# Allegro board TESTBED_IN4007.brd
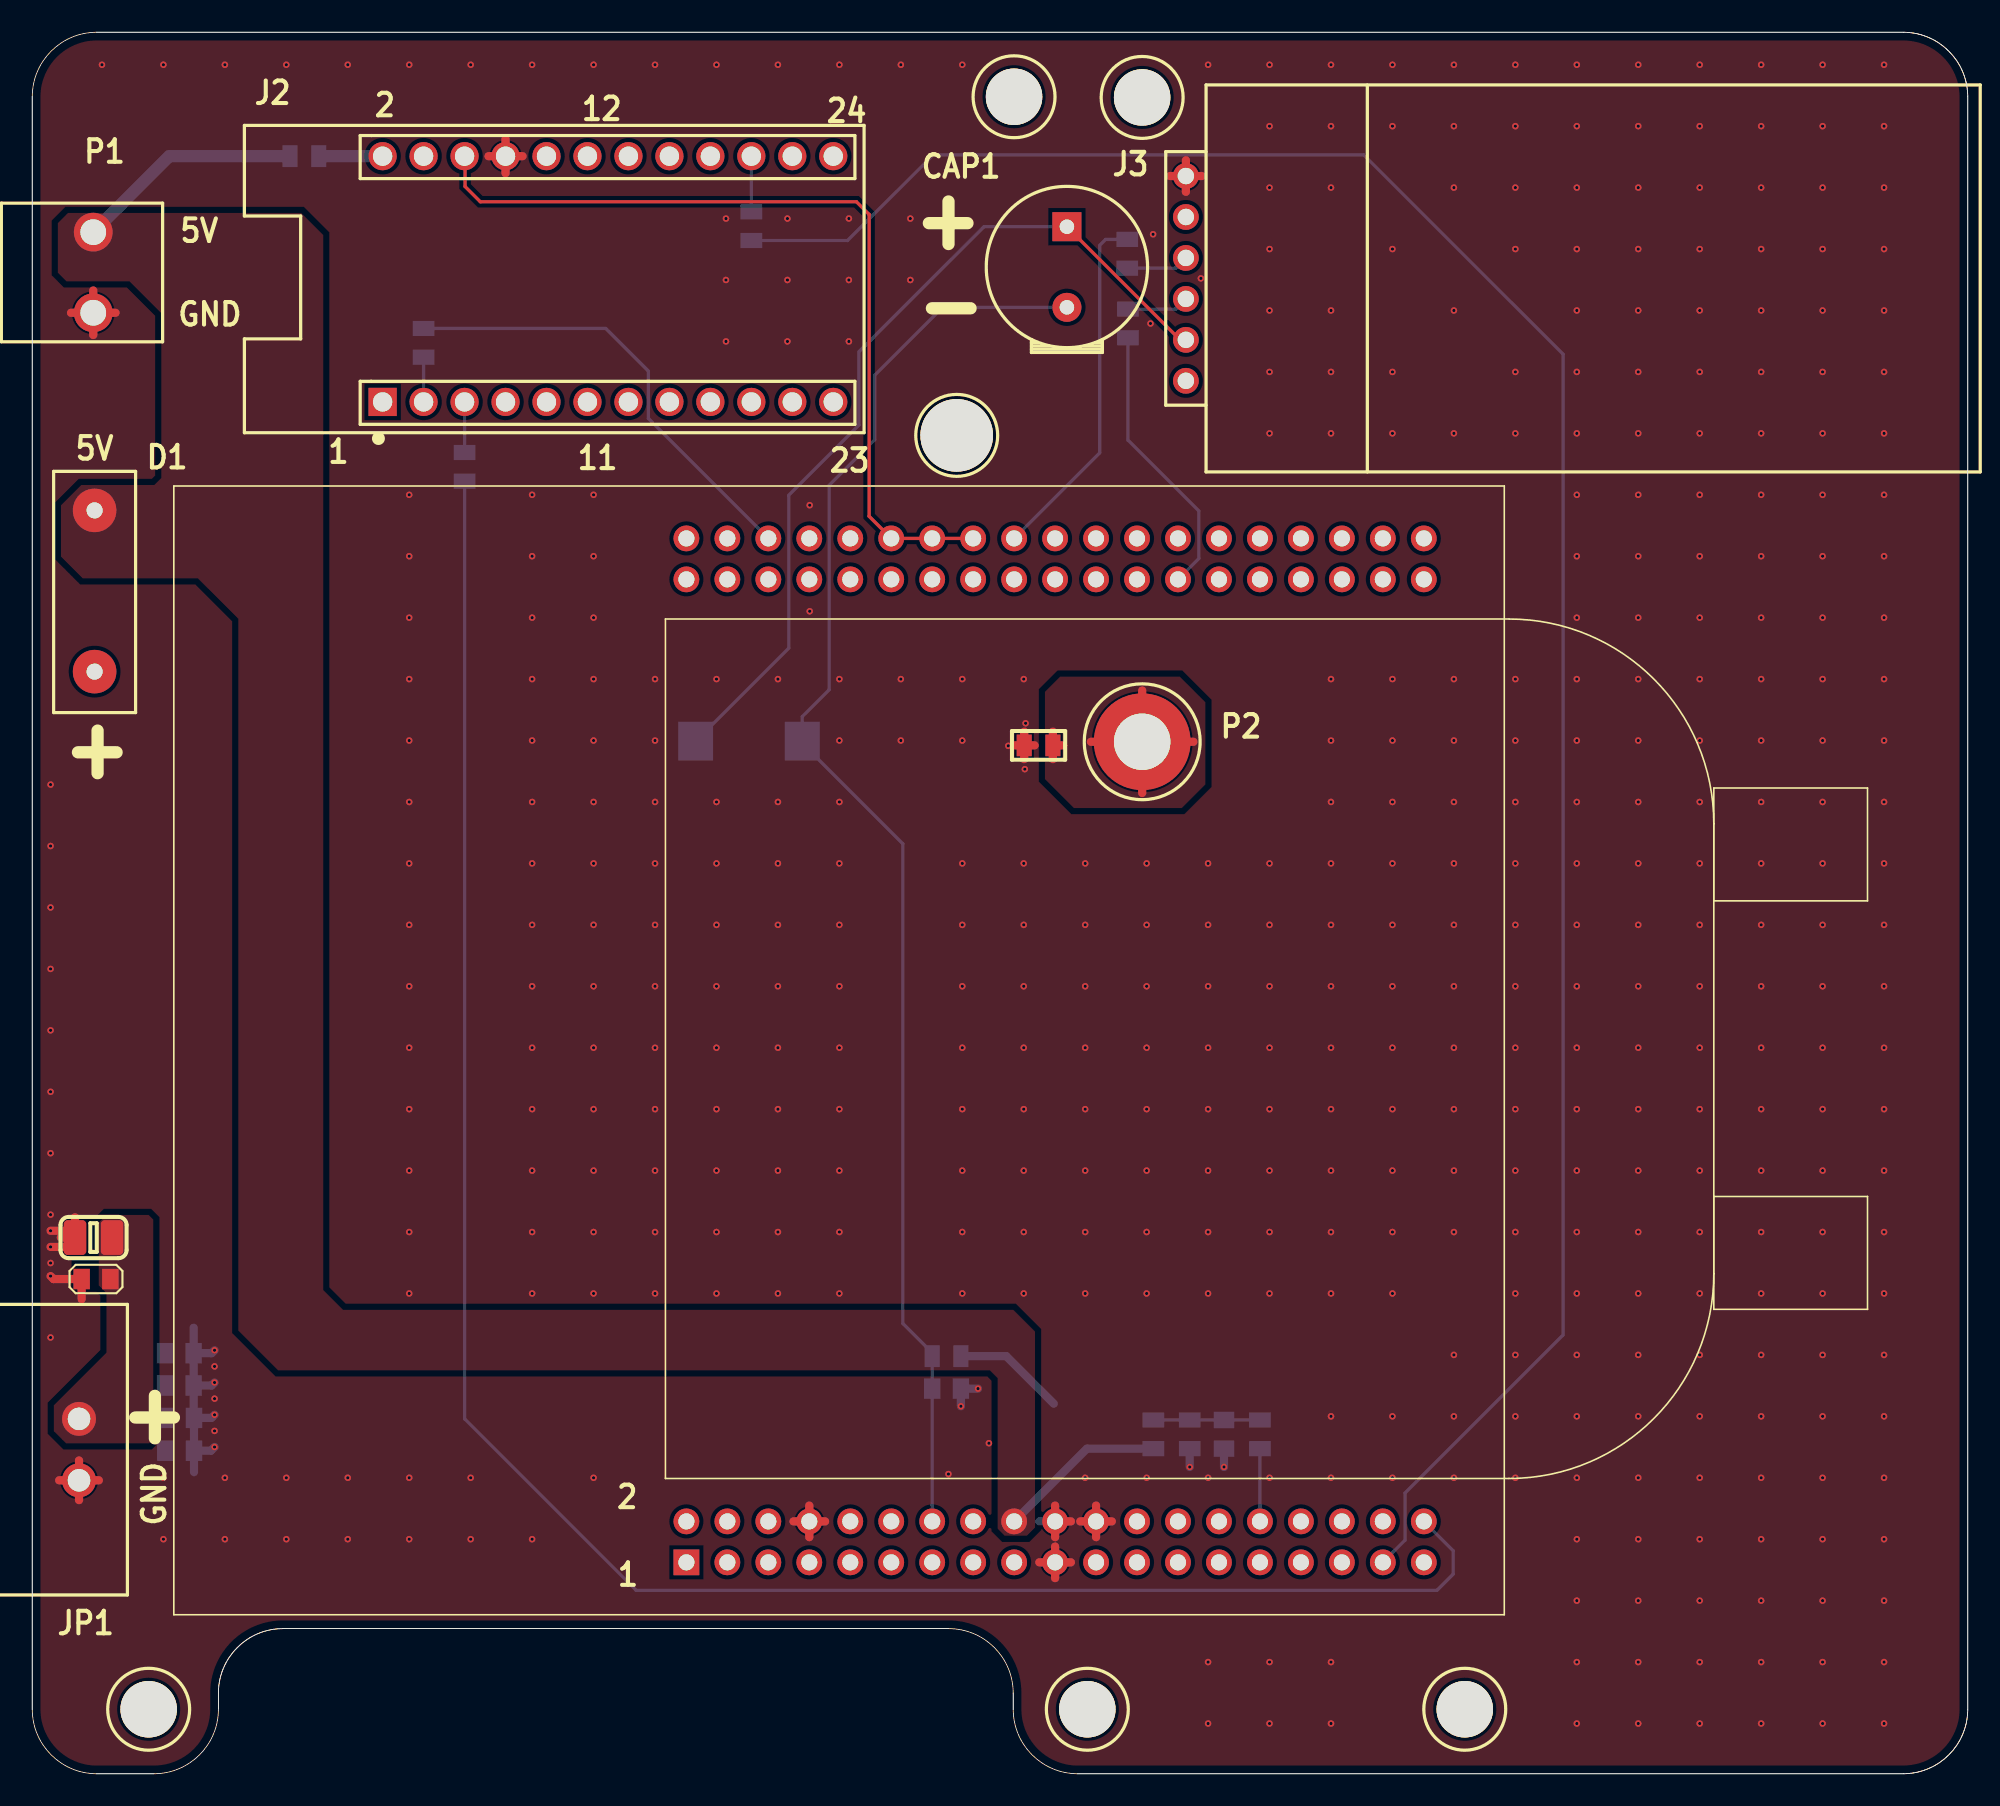
[diagram p0: board, top side]
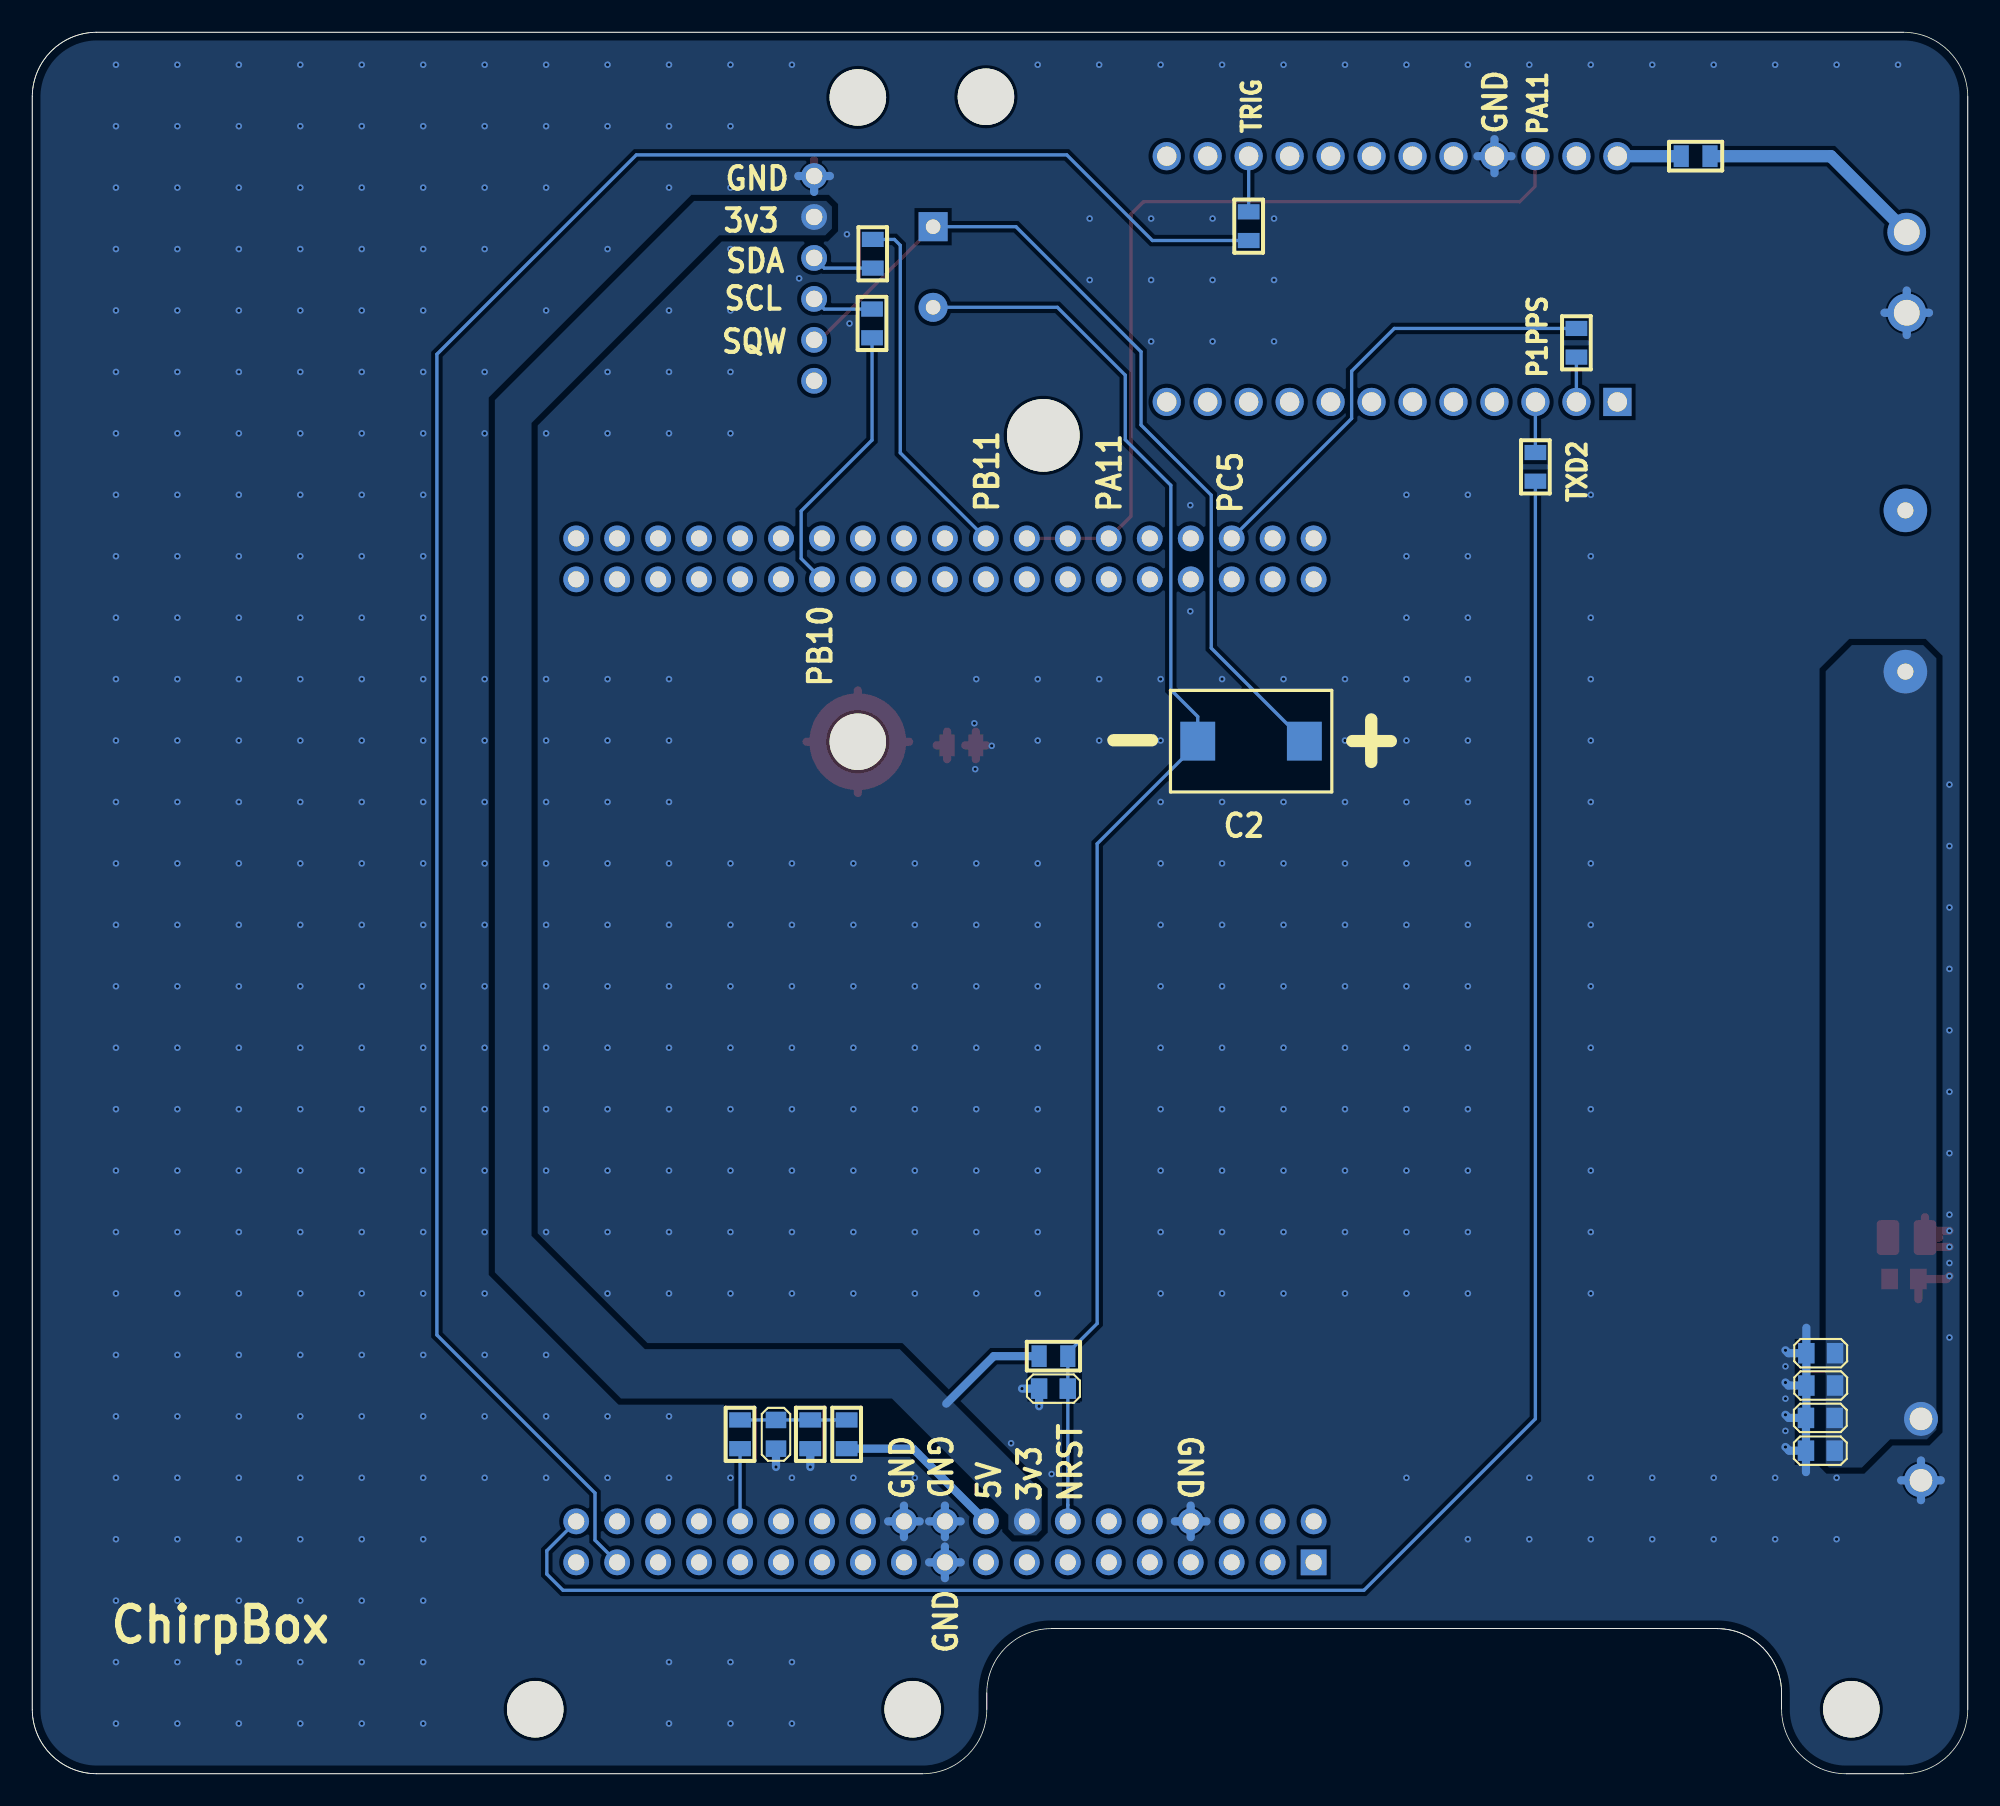
[diagram p1: board, bottom side, seen from below]

Outline 120 x 108 mm; copper layers: TOP, BOTTOM. Coordinates in mm from the lower left corner of the outline.
Outline path: 0,104 0,4 ; 0,104 arc(1.17,106.83) 4,108 ; 0,104 0,4 ; 0,4 arc(1.17,1.17) 4,0 ; 4,108 115.99,108 ; 4,108 115.99,108 ; 115.99,108 arc(118.82,106.83) 120,104 ; 115.99,108 arc(118.82,106.83) 120,104 ; 4,0 7.54,0 ; 4,0 7.54,0 ; 7.54,0 arc(10.37,1.17) 11.54,4 ; 11.54,5 11.54,4 ; 11.54,5 arc(12.71,7.83) 15.54,9 ; 11.54,5 arc(12.71,7.83) 15.54,9 ; 11.54,5 11.54,4 ; 15.54,9 56.82,9 ; 15.54,9 56.82,9 ; 56.82,9 arc(59.65,7.83) 60.82,5 ; 60.82,5 60.82,4 ; 60.82,5 60.82,4 ; 60.82,4 arc(61.99,1.17) 64.82,0 ; 64.82,0 116,0 ; 64.82,0 116,0 ; 116,0 arc(118.83,1.17) 120,4 ; 116,0 arc(118.83,1.17) 120,4 ; 120,104 120,4 ; 120,104 120,4

## Placement (name value [footprint] x y rotation side)
C1  DNP  [C0805]  56.69 23.88 0 bottom
C2  100u 25V X7R  [C7374]  44.43 64.04 0 bottom
C3  0.1u  [C0805]  73.89 21.05 270 bottom
C4  0.1u  [C0805]  9.14 20.04 0 bottom
C5  0.1u  [C0805]  9.14 22.07 0 bottom
C6  0.1u  [C0805]  9.12 24.08 0 bottom
C7  0.1u  [C0805]  9.12 26.08 0 bottom
C8  1u  [C0805]  3.95 30.68 180 top
C9  10u  [C1206]  3.8 33.25 180 top
CAP1  DNP  [CP2V_D10R0_5R0]  64.15 93.44 270 top
D1  1N4007  [2D7X2]  3.87 68.35 90 top
J1  NUCLEO_PLUG  [38PX2]  -13.72 -17.71 0 top
J2  Navspark  [12PX2_2D54_15D24]  35.69 92.69 0 top
J3  RTC_PLUG  [2D54_6P_FEMALE_SMT]  70.95 85.95 0 top
JP1  Holes  [3D81X2]  2.9 22.01 270 top
NOREF  -  [unnamed]  57.32 83 0 top
NOREF#2  -  [unnamed#2]  68.82 64 0 top
NOREF#3  -  [unnamed#2]  68.81 103.96 0 top
NOREF#4  -  [unnamed#2]  65.41 4 0 top
NOREF#5  -  [unnamed#2]  7.22 4 0 top
NOREF#6  -  [unnamed#2]  88.82 4 0 top
NOREF#7  -  [unnamed#2]  60.87 104 0 top
P1  Bat  [MY_2PIN]  3.78 95.6 270 top
P2  HOLE3d5  [I3D5_O6MM]  68.82 64 0 top
R1  100k  [R0805]  56.69 25.9 180 bottom
R2  DNP  [R0805]  16.87 100.31 0 bottom
R3  33  [R0805]  24.26 88.74 90 bottom
R4  33  [R0805]  26.81 81.05 270 bottom
R5  33  [R0805]  44.58 95.97 90 bottom
R6  100k  [R0805]  69.51 21.05 90 bottom
R7  33  [R0805]  67.89 94.26 90 bottom
R8  33  [R0805]  67.93 89.94 270 bottom
R9  33  [R0805]  76.12 21.05 90 bottom
R10  100k  [R0805]  71.76 21.05 90 bottom
R11  DNP  [R0805]  62.39 63.77 0 top

## Library data of the parts
C1 C3-C7 = 0.1u
C2 = 47u 25V_0
C8 = 1u
C9 = 10u
CAP1 = 220u 50V
D1 = 1N4007
J1 = NUCLEO_PLUG
J2 = Navspark Conn
J3 = RTC_PLUG
JP1 = DC2.0
P1 = Bat
P2 = HOLE3d5
R1 R6 R10 = 100k
R2 R11 = DNP
R3-R5 R7-R9 = 33

## Footprints (pads in the part's own frame, mm; a bottom-side part is the same pattern mirrored in y, then rotated)
2D7X2
  round 2.7 hole 1: 1(0,0) 2(10,0)
2D54_6P_FEMALE_SMT
  round 1.6 hole 1.02: 1(0.58,13.13) 2(0.58,10.59) 3(0.58,8.05) 4(0.58,5.51) 5(0.58,2.97) 6(0.58,0.43)
3D81X2
  round 2.1 hole 1.4: 1(0,0) 2(3.81,0)
12PX2_2D54_15D24
  rect 1.75x1.75 hole 1.2: 1(-13.97,-7.62)
  round 1.75 hole 1.2: 2(-13.97,7.62) 3(-11.43,-7.62) 4(-11.43,7.62) 5(-8.89,-7.62) 6(-8.89,7.62) 7(-6.35,-7.62) 8(-6.35,7.62) 9(-3.81,-7.62) 10(-3.81,7.62) 11(-1.27,-7.62) 12(-1.27,7.62) 13(1.27,-7.62) 14(1.27,7.62) 15(3.81,-7.62) 16(3.81,7.62) 17(6.35,-7.62) 18(6.35,7.62) 19(8.89,-7.62) 20(8.89,7.62) 21(11.43,-7.62) 22(11.43,7.62) 23(13.97,-7.62) 24(13.97,7.62)
38PX2
  rect 1.6x1.6 hole 1: 1(54.28,30.82)
  round 1.6 hole 1: 2(54.28,33.36) 3(56.82,30.82) 4(56.82,33.36) 5(59.36,30.82) 6(59.36,33.36) 7(61.9,30.82) 8(61.9,33.36) 9(64.44,30.82) 10(64.44,33.36) 11(66.98,30.82) 12(66.98,33.36) 13(69.52,30.82) 14(69.52,33.36) 15(72.06,30.82) 16(72.06,33.36) 17(74.6,30.82) 18(74.6,33.36) 19(77.14,30.82) 20(77.14,33.36) 21(79.68,30.82) 22(79.68,33.36) 23(82.22,30.82) 24(82.22,33.36) 25(84.76,30.82) 26(84.76,33.36) 27(87.3,30.82) 28(87.3,33.36) 29(89.84,30.82) 30(89.84,33.36) 31(92.38,30.82) 32(92.38,33.36) 33(94.92,30.82) 34(94.92,33.36) 35(97.46,30.82) 36(97.46,33.36) 37(100,30.82) 38(100,33.36) 39(54.28,91.78) 40(54.28,94.32) 41(56.82,91.78) 42(56.82,94.32) 43(59.36,91.78) 44(59.36,94.32) 45(61.9,91.78) 46(61.9,94.32) 47(64.44,91.78) 48(64.44,94.32) 49(66.98,91.78) 50(66.98,94.32) 51(69.52,91.78) 52(69.52,94.32) 53(72.06,91.78) 54(72.06,94.32) 55(74.6,91.78) 56(74.6,94.32) 57(77.14,91.78) 58(77.14,94.32) 59(79.68,91.78) 60(79.68,94.32) 61(82.22,91.78) 62(82.22,94.32) 63(84.76,91.78) 64(84.76,94.32) 65(87.3,91.78) 66(87.3,94.32) 67(89.84,91.78) 68(89.84,94.32) 69(92.38,91.78) 70(92.38,94.32) 71(94.92,91.78) 72(94.92,94.32) 73(97.46,91.78) 74(97.46,94.32) 75(100,91.78) 76(100,94.32)
C0805
  rect 1.02x1.27 smd: 1(-0.89,0) 2(0.89,0)
C1206
  custom 1.402x2.159 smd: 1(-1.15,0) 2(1.15,0)
C7374
  rect 2.16x2.41 smd: 1(-3.3,0) 2(3.31,0)
CP2V_D10R0_5R0
  rect 1.8x1.8 hole 0.9: 1(-2.5,0)
  round 1.8 hole 0.9: 2(2.5,0)
I3D5_O6MM
  round 6 smd: 1(0,0)
MY_2PIN
  round 2.4 hole 1.6: 1(0,0) 2(5,0)
R0805
  rect 0.94x1.35 smd: 1(0.89,0) 2(-0.89,0)
unnamed
  round 4.5 hole 4.5 unplated: (0,0)
unnamed#2
  round 3.5 hole 3.5 unplated: (0,0)

## Nets
+3V3: J1.16 J3.2(VCC) R1.2
+5V: D1.2(K) J1.18 P1.1(+) R2.2 R6.2
GND: C1.2 C3.2 C4.2 C5.2 C6.2 C7.2 C8.2 C9.2 J1.8 J1.19 J1.20 J1.22 J2.8 J3.1(GND) JP1.2(-) P1.2(-) R10.2 R11.2
NRST: C1.1 C2.2 CAP1.2 J1.14 R1.1
P1PPS: J2.5 R4.2
PA1/A1: J1.30 R9.2
PA11: J1.50 J1.52 J1.54 J2.6
PB10: J1.63 R8.1
PB11: J1.56 R7.1
PC0: J1.38 R4.1
PC2: J1.35 R5.2
PC5: J1.44 R3.1
SCL: J3.4(SCL) R8.2
SDA: J3.3(SDA) R7.2
SQW: C2.1 CAP1.1 J3.5(SQW)
TRIG: J2.20 R5.1
TXD2: J2.3 R3.2
N3250342: C3.1 R6.1 R9.1 R10.1
N3272272: C4.1 C5.1 C6.1 C7.1 C8.1 C9.1 D1.1(A) JP1.1(+)
N32806180: P2.1 R11.1
N324336412: J2.2 R2.1

Pads without a net: J1 1 2 3 4 5 6 7 9 10 11 12 13 15 17 21 23 24 25 26 27 28 29 31 32 33 34 36 37 39 40 41 42 43 45 46 47 48 49 51 53 55 57 58 59 60 61 62 64 65 66 67 68 69 70 71 72 73 74 75 76; J2 1 4 7 9 10 11 12 13 14 15 16 17 18 19 21 22 23 24; J3 6

## Via types
v1: diameter 0.406, hole 0.203, TOP to BOTTOM, 472 vias

## Routing (per net, layer and track width the routed paths; a pad name or vN(x,y) marks a point on that pad's centre or on a via; arc(x,y) is an arc through that point)
+3V3: length 7
  BOTTOM w0.508: R1.2 60.39,25.9 63.33,22.95
+5V: length 24.7
  BOTTOM w0.508: R6.2 65.39,20.16 J1.18
  BOTTOM w0.762: R2.2 8.49,100.31 P1.1
GND: length 97.1
  TOP w0.508: J2.8 30.4,100.31 ; J2.8 29.34,99.26 ; J2.8 29.34,101.37 ; J2.8 28.29,100.31 ; JP1.2 2.9,19.43 ; JP1.2 1.67,18.2 ; JP1.2 4.13,18.2 ; JP1.2 2.9,16.97 ; v1(1.14,33.67) 2.23,33.67 C9.2 ; J1.22 65.96,16.63 ; J1.22 66.93,15.65 ; J1.22 65.96,14.67 ; J1.22 64.98,15.65 ; J3.1 72.5,99.08 ; J3.1 71.53,100.06 ; J3.1 71.53,98.11 ; J3.1 70.55,99.08 ; 3.06,29.43 C8.2 1.32,30.68 v1(1.14,30.86) ; J1.20 63.42,16.63 ; J1.20 64.39,15.65 ; J1.20 63.42,14.67 ; P1.2 5.16,90.6 ; P1.2 3.78,89.23 ; P1.2 3.78,91.98 ; P1.2 2.4,90.6 ; J1.19 64.39,13.11 ; J1.19 63.42,12.13 ; J1.19 63.42,14.09 ; J1.19 62.44,13.11 ; C9.2 2.07,32.67 v1(1.14,32.67) ; C9.2 1.77,33.25 ; C9.2 2.65,34.51 ; 48.18,14.67 J1.8 ; J1.8 49.15,15.65 ; J1.8 48.18,16.63 ; J1.8 47.2,15.65 ; 60.85,63.77 R11.2 ; R11.2 61.5,62.92 ; R11.2 61.5,64.63 ; R11.2 62.15,63.77
  BOTTOM w0.508: v1(11.3,24.26) 11.12,24.08 C6.2 ; J1.19 63.42,14.09 ; J1.19 62.44,13.11 ; J1.19 64.39,13.11 ; J1.19 63.42,12.13 ; 71.53,98.11 J3.1 ; J3.1 72.5,99.08 ; J3.1 70.55,99.08 ; 3.78,89.23 P1.2 ; P1.2 3.78,91.98 ; P1.2 2.4,90.6 ; P1.2 5.16,90.6 ; C5.2 11.11,22.07 v1(11.3,22.26) ; C5.2 10.01,22.09 C6.2 ; C5.2 C4.2 ; J2.8 29.34,101.37 ; J2.8 29.34,99.26 ; J2.8 28.29,100.31 ; J2.8 30.4,100.31 ; 47.2,15.65 J1.8 ; J1.8 48.18,16.63 ; J1.8 49.15,15.65 ; J1.8 48.18,14.67 ; J1.22 66.93,15.65 ; J1.22 64.98,15.65 ; J1.22 65.96,16.63 ; J1.22 65.96,14.67 ; 2.9,16.97 JP1.2 ; JP1.2 4.13,18.2 ; JP1.2 1.67,18.2 ; JP1.2 2.9,19.43 ; C3.2 v1(73.89,19.03) ; v1(57.58,22.79) C1.2 v1(58.64,23.88) ; v1(11.3,20.26) 11.08,20.04 C4.2 ; v1(11.3,26.26) 11.12,26.08 C7.2 ; C6.2 C7.2 ; 63.42,14.67 J1.20 ; J1.20 62.44,15.65 ; J1.20 64.39,15.65 ; J1.20 63.42,16.63 ; C7.2 10.01,27.66 ; C4.2 10.03,18.71 ; R10.2 v1(71.76,19.03)
  vias: v1(1.14,61.34) v1(1.14,57.53) v1(1.14,53.72) v1(1.14,49.91) v1(1.14,46.1) v1(1.14,42.29) v1(1.14,38.48) v1(1.14,34.67) v1(1.14,31.67) v1(1.14,27.05) v1(4.32,105.99) v1(8.13,105.99) v1(8.13,18.36) v1(8.13,14.55) v1(11.3,25.26) v1(11.3,23.26) v1(11.3,21.26) v1(11.94,105.99) v1(11.94,18.36) v1(11.94,14.55) v1(15.75,105.99) v1(15.75,18.36) v1(15.75,14.55) v1(19.56,105.99) v1(19.56,18.36) v1(19.56,14.55) v1(23.37,105.99) v1(23.37,79.32) v1(23.37,75.51) v1(23.37,71.7) v1(23.37,67.89) v1(23.37,64.08) v1(23.37,60.27) v1(23.37,56.46) v1(23.37,52.65) v1(23.37,48.84) v1(23.37,45.03) v1(23.37,41.22) v1(23.37,37.41) v1(23.37,33.6) v1(23.37,29.79) v1(23.37,18.36) v1(23.37,14.55) v1(27.18,105.99) v1(27.18,18.36) v1(27.18,14.55) v1(30.99,105.99) v1(30.99,79.32) v1(30.99,75.51) v1(30.99,71.7) v1(30.99,67.89) v1(30.99,64.08) v1(30.99,60.27) v1(30.99,56.46) v1(30.99,52.65) v1(30.99,48.84) v1(30.99,45.03) v1(30.99,41.22) v1(30.99,37.41) v1(30.99,33.6) v1(30.99,29.79) v1(30.99,14.55) v1(34.8,105.99) v1(34.8,79.32) v1(34.8,75.51) v1(34.8,71.7) v1(34.8,67.89) v1(34.8,64.08) v1(34.8,60.27) v1(34.8,56.46) v1(34.8,52.65) v1(34.8,48.84) v1(34.8,45.03) v1(34.8,41.22) v1(34.8,37.41) v1(34.8,33.6) v1(34.8,29.79) v1(34.8,18.36) v1(38.61,105.99) v1(38.61,67.89) v1(38.61,64.08) v1(38.61,60.27) v1(38.61,56.46) v1(38.61,52.65) v1(38.61,48.84) v1(38.61,45.03) v1(38.61,41.22) v1(38.61,37.41) v1(38.61,33.6) v1(38.61,29.79) v1(42.42,105.99) v1(42.42,67.89) v1(42.42,60.27) v1(42.42,56.46) v1(42.42,52.65) v1(42.42,48.84) v1(42.42,45.03) v1(42.42,41.22) v1(42.42,37.41) v1(42.42,33.6) v1(42.42,29.79) v1(43.01,96.45) v1(43.01,92.64) v1(43.01,88.83) v1(46.23,105.99) v1(46.23,67.89) v1(46.23,60.27) v1(46.23,56.46) v1(46.23,52.65) v1(46.23,48.84) v1(46.23,45.03) v1(46.23,41.22) v1(46.23,37.41) v1(46.23,33.6) v1(46.23,29.79) v1(46.82,96.45) v1(46.82,92.64) v1(46.82,88.83) v1(48.2,78.67) v1(48.2,72.09) v1(50.04,105.99) v1(50.04,67.89) v1(50.04,64.08) v1(50.04,60.27) v1(50.04,56.46) v1(50.04,52.65) v1(50.04,48.84) v1(50.04,45.03) v1(50.04,41.22) v1(50.04,37.41) v1(50.04,33.6) v1(50.04,29.79) v1(50.63,96.45) v1(50.63,92.64) v1(50.63,88.83) v1(53.85,105.99) v1(53.85,67.89) v1(53.85,64.08) v1(54.44,96.45) v1(54.44,92.64) v1(56.8,18.59) v1(57.66,105.99) v1(57.66,67.89) v1(57.66,64.08) v1(57.66,56.46) v1(57.66,52.65) v1(57.66,48.84) v1(57.66,45.03) v1(57.66,41.22) v1(57.66,37.41) v1(57.66,33.6) v1(57.66,29.79) v1(59.31,20.5) v1(60.51,63.75) v1(61.47,67.89) v1(61.47,56.46) v1(61.47,52.65) v1(61.47,48.84) v1(61.47,45.03) v1(61.47,41.22) v1(61.47,37.41) v1(61.47,33.6) v1(61.47,29.79) v1(61.59,65.15) v1(61.54,62.3) v1(65.28,56.46) v1(65.28,52.65) v1(65.28,48.84) v1(65.28,45.03) v1(65.28,41.22) v1(65.28,37.41) v1(65.28,33.6) v1(65.28,29.79) v1(65.28,18.36) v1(69.09,56.46) v1(69.09,52.65) v1(69.09,48.84) v1(69.09,45.03) v1(69.09,41.22) v1(69.09,37.41) v1(69.09,33.6) v1(69.09,29.79) v1(69.09,18.36) v1(69.33,89.94) v1(69.49,95.47) v1(72.45,92.74) v1(72.9,105.99) v1(72.9,56.46) v1(72.9,52.65) v1(72.9,48.84) v1(72.9,45.03) v1(72.9,41.22) v1(72.9,37.41) v1(72.9,33.6) v1(72.9,29.79) v1(72.9,18.36) v1(72.9,6.93) v1(72.9,3.12) v1(76.71,105.99) v1(76.71,102.18) v1(76.71,98.37) v1(76.71,94.56) v1(76.71,90.75) v1(76.71,86.94) v1(76.71,83.13) v1(76.71,56.46) v1(76.71,52.65) v1(76.71,48.84) v1(76.71,45.03) v1(76.71,41.22) v1(76.71,37.41) v1(76.71,33.6) v1(76.71,29.79) v1(76.71,18.36) v1(76.71,6.93) v1(76.71,3.12) v1(80.52,105.99) v1(80.52,102.18) v1(80.52,98.37) v1(80.52,90.75) v1(80.52,86.94) v1(80.52,83.13) v1(80.52,67.89) v1(80.52,64.08) v1(80.52,60.27) v1(80.52,56.46) v1(80.52,52.65) v1(80.52,48.84) v1(80.52,45.03) v1(80.52,41.22) v1(80.52,37.41) v1(80.52,33.6) v1(80.52,29.79) v1(80.52,22.17) v1(80.52,18.36) v1(80.52,6.93) v1(80.52,3.12) v1(84.33,105.99) v1(84.33,102.18) v1(84.33,94.56) v1(84.33,86.94) v1(84.33,83.13) v1(84.33,67.89) v1(84.33,64.08) v1(84.33,60.27) v1(84.33,56.46) v1(84.33,52.65) v1(84.33,48.84) v1(84.33,45.03) v1(84.33,41.22) v1(84.33,37.41) v1(84.33,33.6) v1(84.33,29.79) v1(84.33,22.17) v1(84.33,18.36) v1(88.14,105.99) v1(88.14,102.18) v1(88.14,98.37) v1(88.14,90.75) v1(88.14,83.13) v1(88.14,67.89) v1(88.14,64.08) v1(88.14,60.27) v1(88.14,56.46) v1(88.14,52.65) v1(88.14,48.84) v1(88.14,45.03) v1(88.14,41.22) v1(88.14,37.41) v1(88.14,33.6) v1(88.14,25.98) v1(88.14,22.17) v1(88.14,18.36) v1(91.95,105.99) v1(91.95,102.18) v1(91.95,98.37) v1(91.95,94.56) v1(91.95,86.94) v1(91.95,83.13) v1(91.95,67.89) v1(91.95,64.08) v1(91.95,60.27) v1(91.95,56.46) v1(91.95,52.65) v1(91.95,48.84) v1(91.95,45.03) v1(91.95,41.22) v1(91.95,37.41) v1(91.95,33.6) v1(91.95,29.79) v1(91.95,25.98) v1(91.95,22.17) v1(91.95,18.36) v1(95.76,105.99) v1(95.76,102.18) v1(95.76,98.37) v1(95.76,94.56) v1(95.76,90.75) v1(95.76,86.94) v1(95.76,83.13) v1(95.76,79.32) v1(95.76,75.51) v1(95.76,71.7) v1(95.76,67.89) v1(95.76,64.08) v1(95.76,60.27) v1(95.76,56.46) v1(95.76,52.65) v1(95.76,48.84) v1(95.76,45.03) v1(95.76,41.22) v1(95.76,37.41) v1(95.76,33.6) v1(95.76,29.79) v1(95.76,25.98) v1(95.76,22.17) v1(95.76,18.36) v1(95.76,14.55) v1(95.76,10.74) v1(95.76,6.93) v1(95.76,3.12) v1(99.57,105.99) v1(99.57,102.18) v1(99.57,98.37) v1(99.57,94.56) v1(99.57,90.75) v1(99.57,86.94) v1(99.57,83.13) v1(99.57,79.32) v1(99.57,75.51) v1(99.57,71.7) v1(99.57,67.89) v1(99.57,64.08) v1(99.57,60.27) v1(99.57,56.46) v1(99.57,52.65) v1(99.57,48.84) v1(99.57,45.03) v1(99.57,41.22) v1(99.57,37.41) v1(99.57,33.6) v1(99.57,29.79) v1(99.57,25.98) v1(99.57,22.17) v1(99.57,18.36) v1(99.57,14.55) v1(99.57,10.74) v1(99.57,6.93) v1(99.57,3.12) v1(103.38,105.99) v1(103.38,102.18) v1(103.38,98.37) v1(103.38,94.56) v1(103.38,90.75) v1(103.38,86.94) v1(103.38,83.13) v1(103.38,79.32) v1(103.38,75.51) v1(103.38,71.7) v1(103.38,67.89) v1(103.38,64.08) v1(103.38,60.27) v1(103.38,56.46) v1(103.38,52.65) v1(103.38,48.84) v1(103.38,45.03) v1(103.38,41.22) v1(103.38,37.41) v1(103.38,33.6) v1(103.38,29.79) v1(103.38,25.98) v1(103.38,22.17) v1(103.38,18.36) v1(103.38,14.55) v1(103.38,10.74) v1(103.38,6.93) v1(103.38,3.12) v1(107.19,105.99) v1(107.19,102.18) v1(107.19,98.37) v1(107.19,94.56) v1(107.19,90.75) v1(107.19,86.94) v1(107.19,83.13) v1(107.19,79.32) v1(107.19,75.51) v1(107.19,71.7) v1(107.19,67.89) v1(107.19,64.08) v1(107.19,60.27) v1(107.19,56.46) v1(107.19,52.65) v1(107.19,48.84) v1(107.19,45.03) v1(107.19,41.22) v1(107.19,37.41) v1(107.19,33.6) v1(107.19,29.79) v1(107.19,25.98) v1(107.19,22.17) v1(107.19,18.36) v1(107.19,14.55) v1(107.19,10.74) v1(107.19,6.93) v1(107.19,3.12) v1(111,105.99) v1(111,102.18) v1(111,98.37) v1(111,94.56) v1(111,90.75) v1(111,86.94) v1(111,83.13) v1(111,79.32) v1(111,75.51) v1(111,71.7) v1(111,67.89) v1(111,64.08) v1(111,60.27) v1(111,56.46) v1(111,52.65) v1(111,48.84) v1(111,45.03) v1(111,41.22) v1(111,37.41) v1(111,33.6) v1(111,29.79) v1(111,25.98) v1(111,22.17) v1(111,18.36) v1(111,14.55) v1(111,10.74) v1(111,6.93) v1(111,3.12) v1(114.81,105.99) v1(114.81,102.18) v1(114.81,98.37) v1(114.81,94.56) v1(114.81,90.75) v1(114.81,86.94) v1(114.81,83.13) v1(114.81,79.32) v1(114.81,75.51) v1(114.81,71.7) v1(114.81,67.89) v1(114.81,64.08) v1(114.81,60.27) v1(114.81,56.46) v1(114.81,52.65) v1(114.81,48.84) v1(114.81,45.03) v1(114.81,41.22) v1(114.81,37.41) v1(114.81,33.6) v1(114.81,29.79) v1(114.81,25.98) v1(114.81,22.17) v1(114.81,18.36) v1(114.81,14.55) v1(114.81,10.74) v1(114.81,6.93) v1(114.81,3.12)
NRST: length 89.9
  BOTTOM w0.203: J1.14 55.8,16.67 55.8,16.67 C1.1 R1.1 55.8,26.1 53.98,27.92 53.98,57.68 47.74,63.91 C2.2 47.74,65.56 49.41,67.23 49.41,79.91 52.23,82.73 52.23,86.74 56.44,90.94 CAP1.2
P1PPS: length 3.1
  BOTTOM w0.203: R4.2 26.81,85.07 J2.5
PA1/A1: length 4.5
  BOTTOM w0.203: R9.2 J1.30
PA11: length 53.4
  TOP w0.203: J1.54 J1.52 J1.50 51.88,77.98 51.88,96.7 51.1,97.49 27.78,97.49 26.83,98.43 26.83,100.28 J2.6
PB10: length 17.3
  BOTTOM w0.203: R8.1 67.93,82.71 72.33,78.31 72.33,75.36 J1.63
PB11: length 22.2
  BOTTOM w0.203: R7.1 66.55,95.15 66.18,94.79 66.18,81.92 J1.56
PC0: length 128.3
  BOTTOM w0.203: J1.38 88.1,13.83 88.1,12.39 87.09,11.38 37.44,11.38 26.81,22.01 R4.1
PC2: length 137.2
  BOTTOM w0.203: R5.2 50.55,95.08 55.86,100.39 82.55,100.39 94.91,88.03 94.91,27.21 85.11,17.41 85.11,14.49 J1.35
PC5: length 28.5
  BOTTOM w0.203: R3.1 35.55,89.63 38.2,86.98 38.2,84.05 J1.44
SCL: length 3.9
  BOTTOM w0.203: R8.2 70.89,90.83 J3.4
SDA: length 3.9
  BOTTOM w0.203: J3.3 70.89,93.37 R7.2
SQW: length 54.7
  TOP w0.203: CAP1.1 71.17,88.92 J3.5
  BOTTOM w0.203: CAP1.1 59.01,95.94 51.26,88.19 51.26,83.64 46.9,79.29 46.9,69.81 C2.1
TRIG: length 3.5
  BOTTOM w0.203: R5.1 J2.20
TXD2: length 2.8
  BOTTOM w0.203: R3.2 J2.3
N3250342: length 6.6
  BOTTOM w0.203: R9.1 C3.1 R10.1 R6.1
N32806180: length 15.1
  TOP w0.508: P2.1 71.99,64 ; P2.1 65.64,64 ; P2.1 68.82,67.18 ; P2.1 68.82,60.82 ; R11.1 63.28,64.63 ; R11.1 63.28,62.92 ; R11.1 63.93,63.77
N324336412: length 4
  BOTTOM w0.762: J2.2 R2.1

## Copper pours and planes (outline as drawn; the poured copper is in the pictures)
+3V3 on BOTTOM: 57.75,14.78 59.09,14.78 59.48,15.17 59.48,16.05 66.7,23.27 83.49,23.27 91.32,31.09 91.32,85.19 78.97,97.54 70.77,97.54 70.42,97.19 70.42,95.82 70.83,95.41 77.41,95.41 89.05,83.77 89.05,33.36 82.01,26.33 66.21,26.33 57.42,17.54 57.42,15.12
+5V on TOP: 2.22,96.8 16.67,96.8 18.04,95.43 18.04,30 19.27,28.77 60.83,28.77 62.17,27.43 62.17,15.27 61.66,14.76 60.29,14.76 59.86,15.19 59.86,24.53 59.37,25.02 15.24,25.02 12.77,27.49 12.77,71.63 10.27,74.14 3.13,74.14 1.78,75.49 1.78,78.67 3.04,79.92 7.57,79.92 8,80.36 8,90.58 6.02,92.55 2.12,92.55 1.59,93.08 1.59,96.17
GND on TOP: 64.82,0.51 62.35,1.53 61.33,4 61.33,5 60.01,8.19 56.82,9.51 15.54,9.51 12.35,8.19 11.03,5 11.03,4 10.01,1.53 7.54,0.51 4,0.51 1.53,1.53 0.51,4 0.51,104 1.53,106.47 4,107.49 115.99,107.49 118.47,106.47 119.49,104 119.49,4 118.47,1.53 116,0.51 ; 2 cut-outs
GND on BOTTOM: 15.54,9.51 12.35,8.19 11.03,5 11.03,4 10.01,1.53 7.54,0.51 4,0.51 1.53,1.53 0.51,4 0.51,104 1.53,106.47 4,107.49 115.99,107.49 118.47,106.47 119.49,104 119.49,4 118.47,1.53 116,0.51 64.82,0.51 62.35,1.53 61.33,4 61.33,5 60.01,8.19 56.82,9.51 ; 9 cut-outs
N3272272 on TOP: 4.6,29.81 4.6,26.12 1.34,22.85 1.34,21.25 2.09,20.49 7.25,20.49 7.5,20.74 7.5,34.36 7.21,34.66 4.6,34.66 4.13,34.18 4.13,30.29
N3272272 on BOTTOM: 2.53,20.74 4.82,20.74 6.57,18.99 8.6,18.99 8.81,19.19 8.81,68.37 7.18,70 2.77,70 1.95,69.18 1.95,21.32
N32806180 on TOP: 71.14,68.04 72.73,66.45 72.73,61.36 71.27,59.89 64.58,59.89 62.79,61.68 62.79,67.1 63.73,68.04

## Text on the board
Ref Des/Silkscreen Bottom: TXD2 | PA11 | P1PPS | TRIG | SDA | GND | SCL | 3v3 | SQW | PC5 | NRST | 5V | PB11 | PB10 | ChirpBox
Ref Des/Silkscreen Top: 5V | GND
COMPVAL_TYPE_TOP: FIGURE | SIZE | 8.0 | 35.433 | 39.37 | 40.157 | 47.24 | 55.118 | 62.992 | 137.795 | 177.165 | DRILL CHART: TOP to BOTTOM | ALL UNITS ARE IN MILS | PLATED | NON-PLATED | QTY | 472 | 2 | 75 | 1 | 6 | 24
DIMENSION: 108.0000 | 120.0000 | 4-M6通 | \fFangSong_GB2312;2-M3深5 | \fFangSong_GB2312;2-M4深7 | TOP
